# Altium PCB Main.PcbDoc
Units mil, origin at the board's own origin, x right, y up, seen from the top; angles counter-clockwise.
Board outline 1968.5 x 1911.5 mil, 4 copper layers (Top Layer, GND Place, 3V3 Plane, Bottom Layer), stack 23.756 mil thick; 22 components, 17 nets, 82 pads, 4 vias.
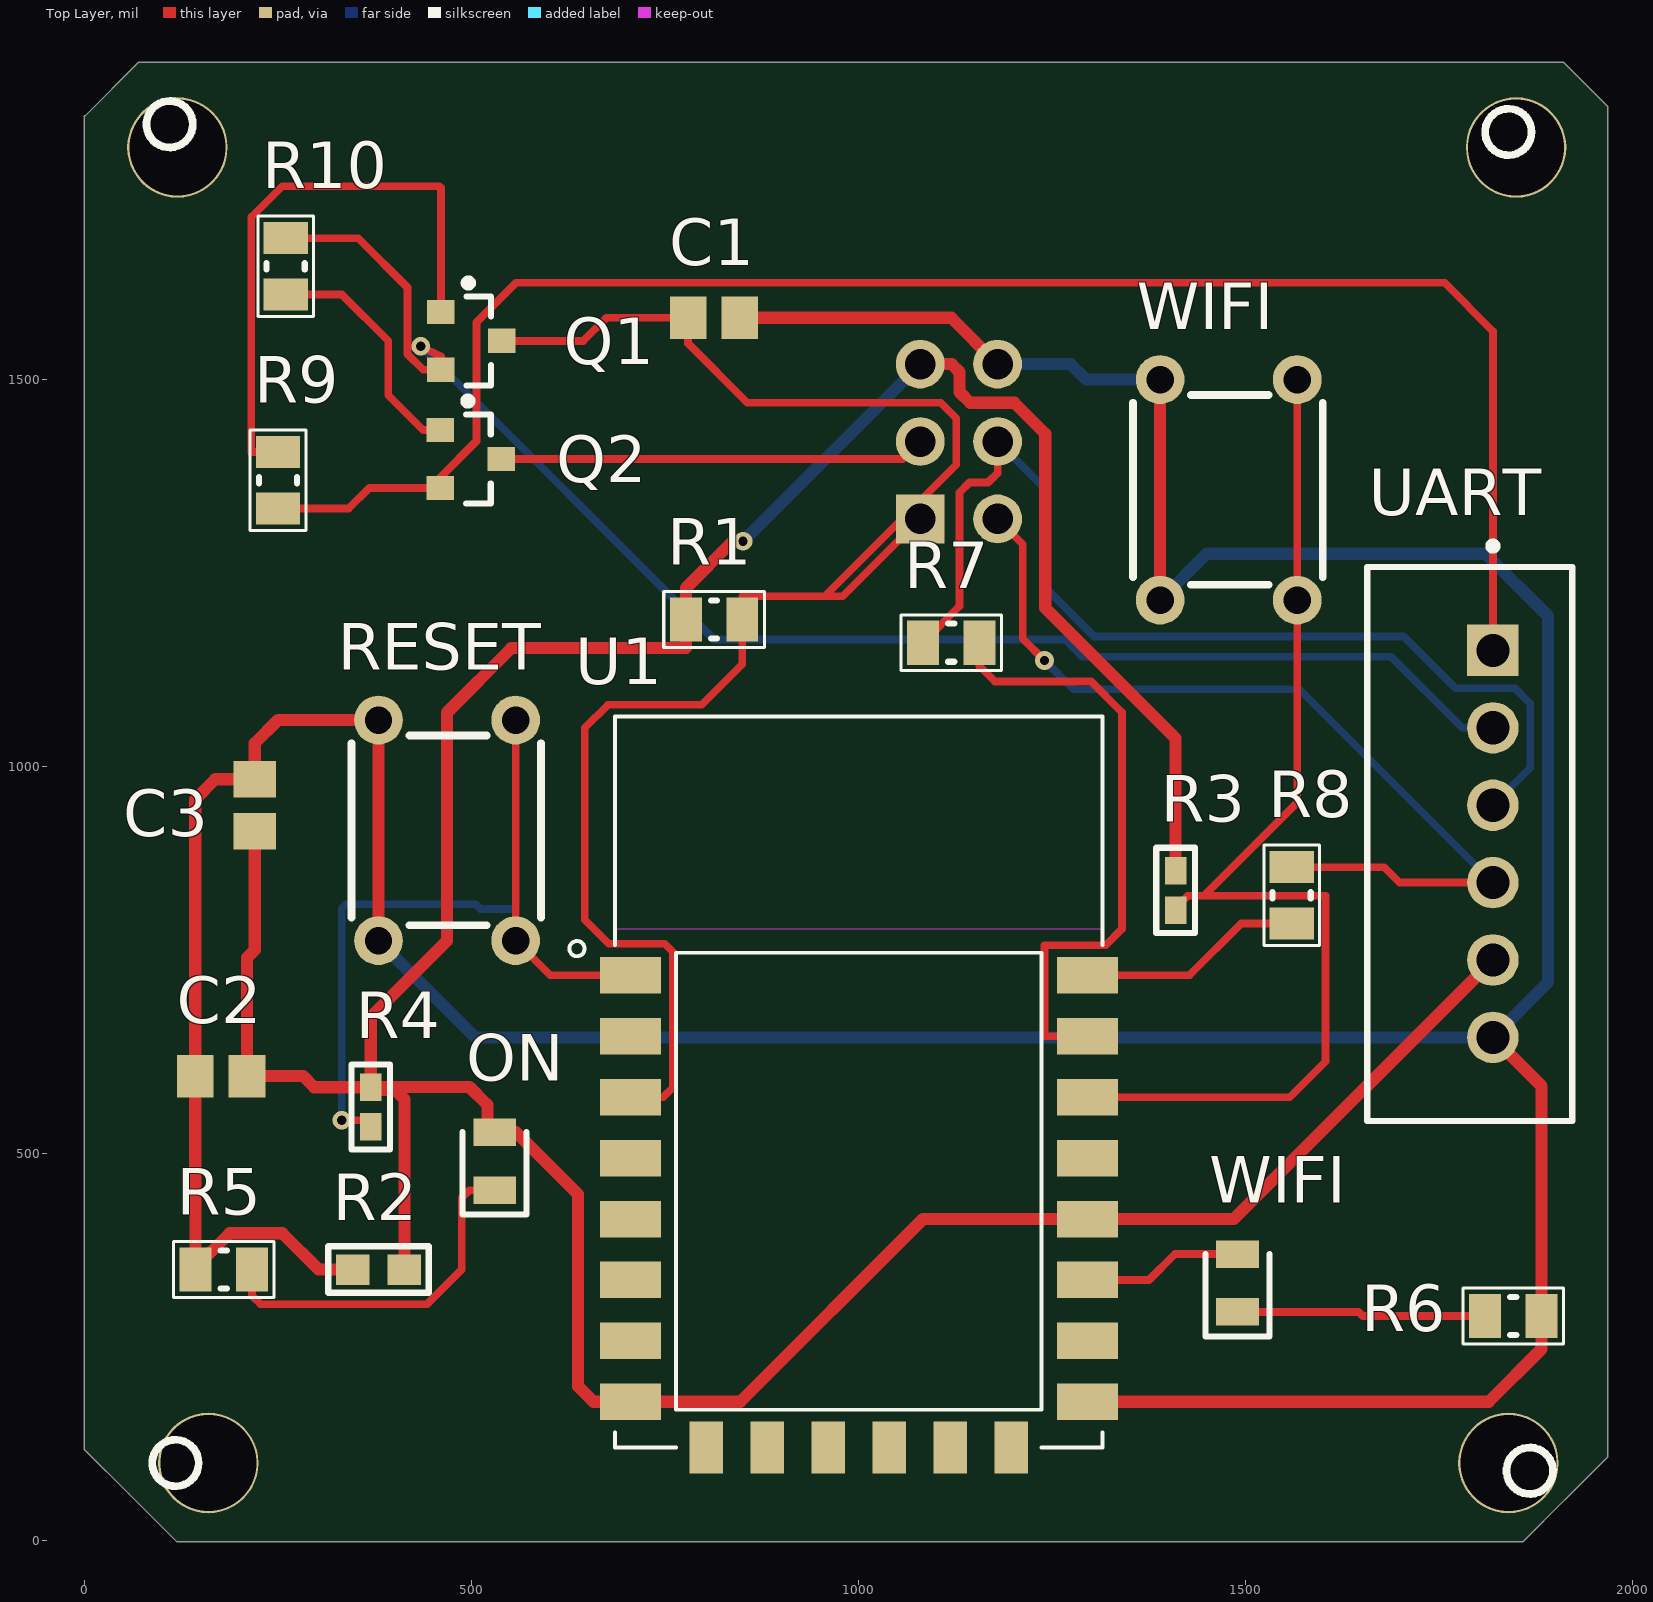
[diagram p0: Top Layer view]
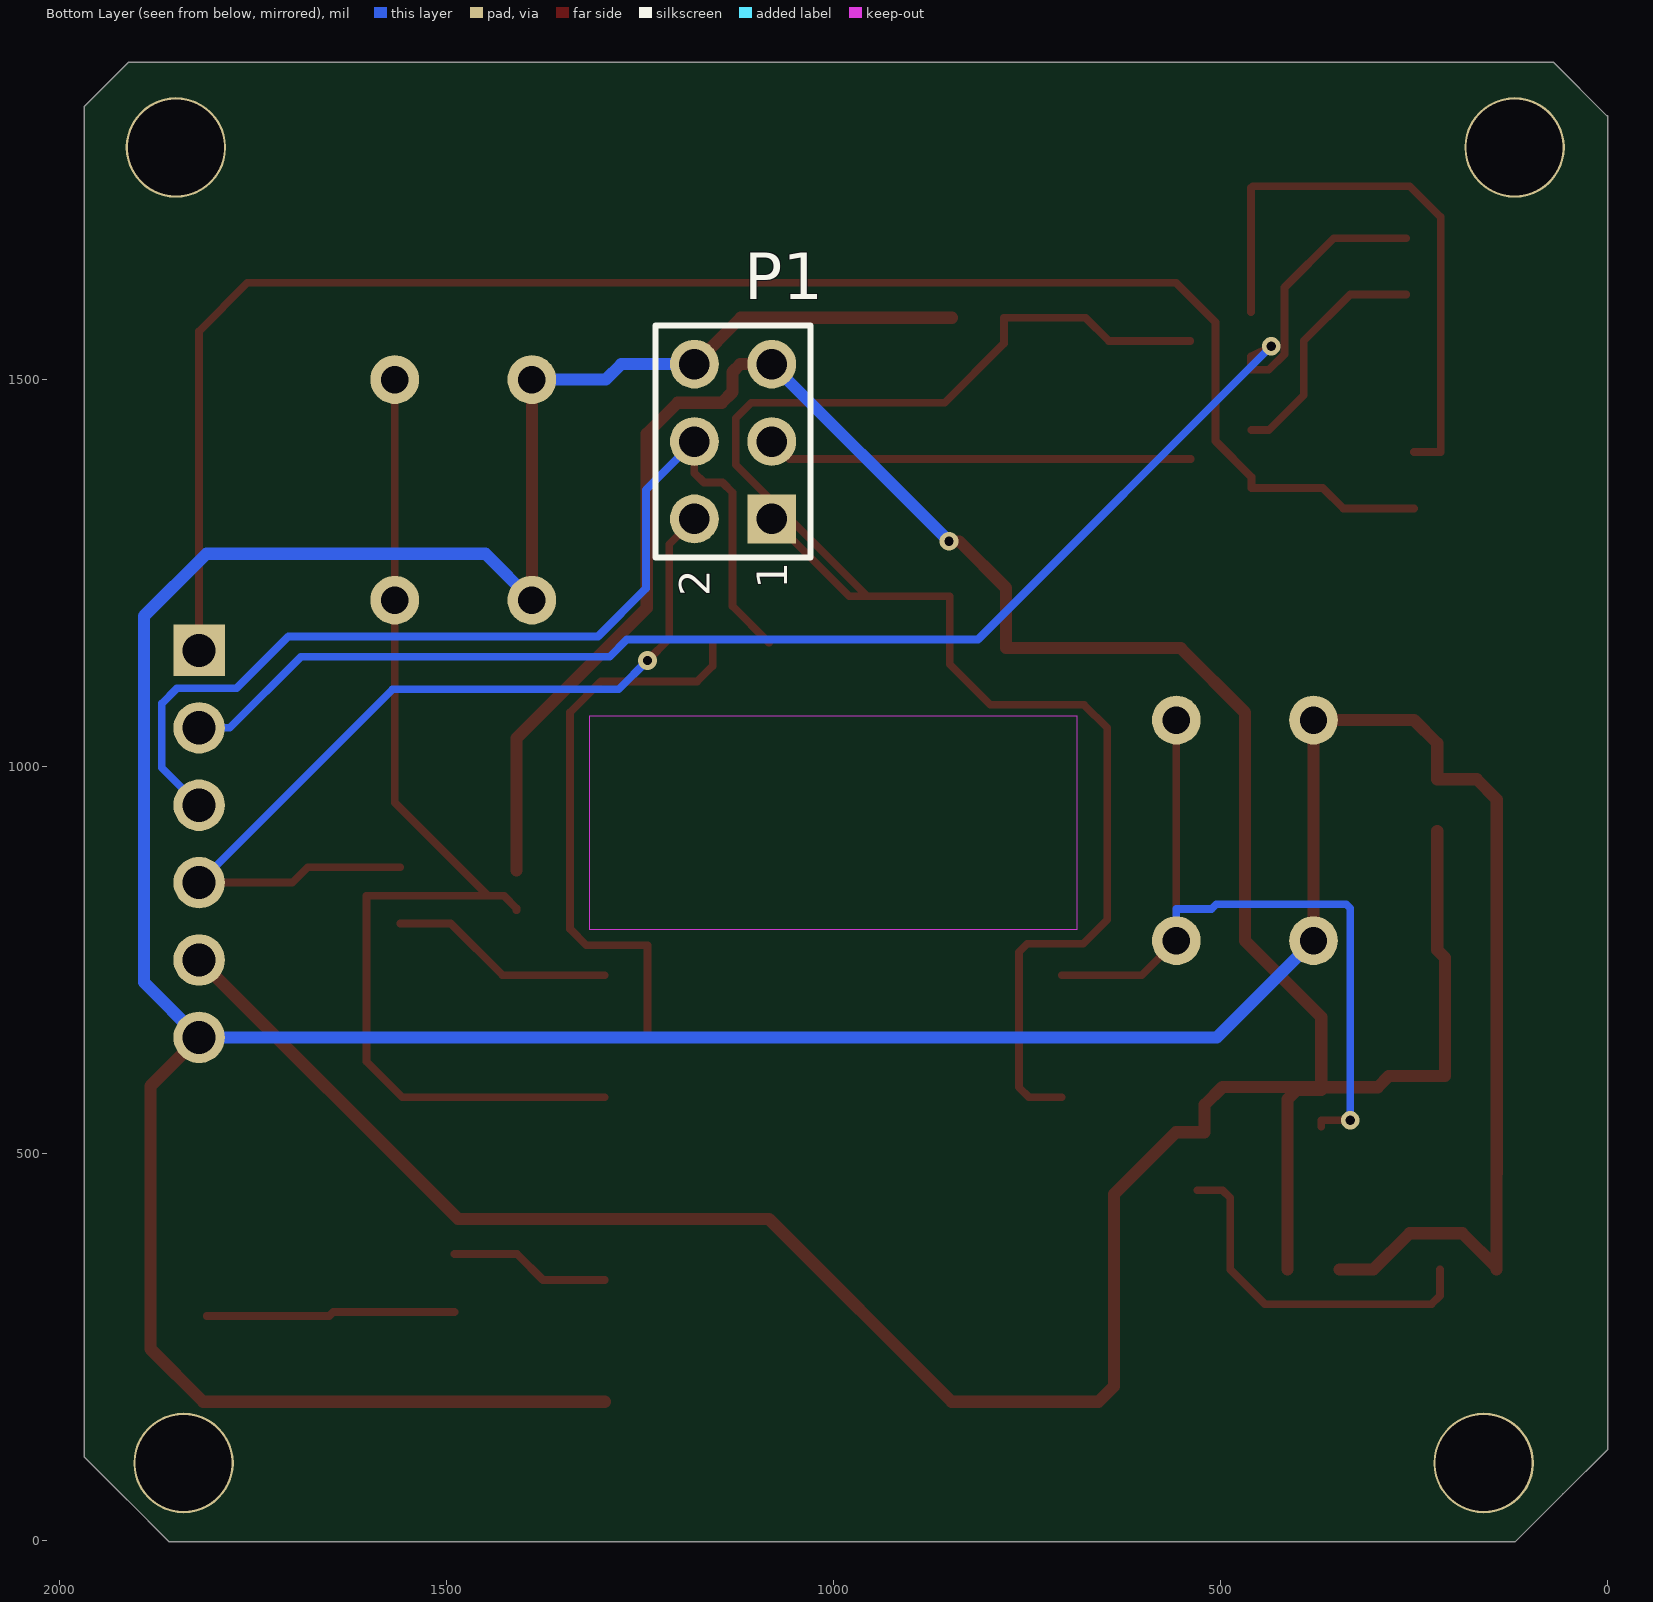
[diagram p1: Bottom Layer view, seen from below]
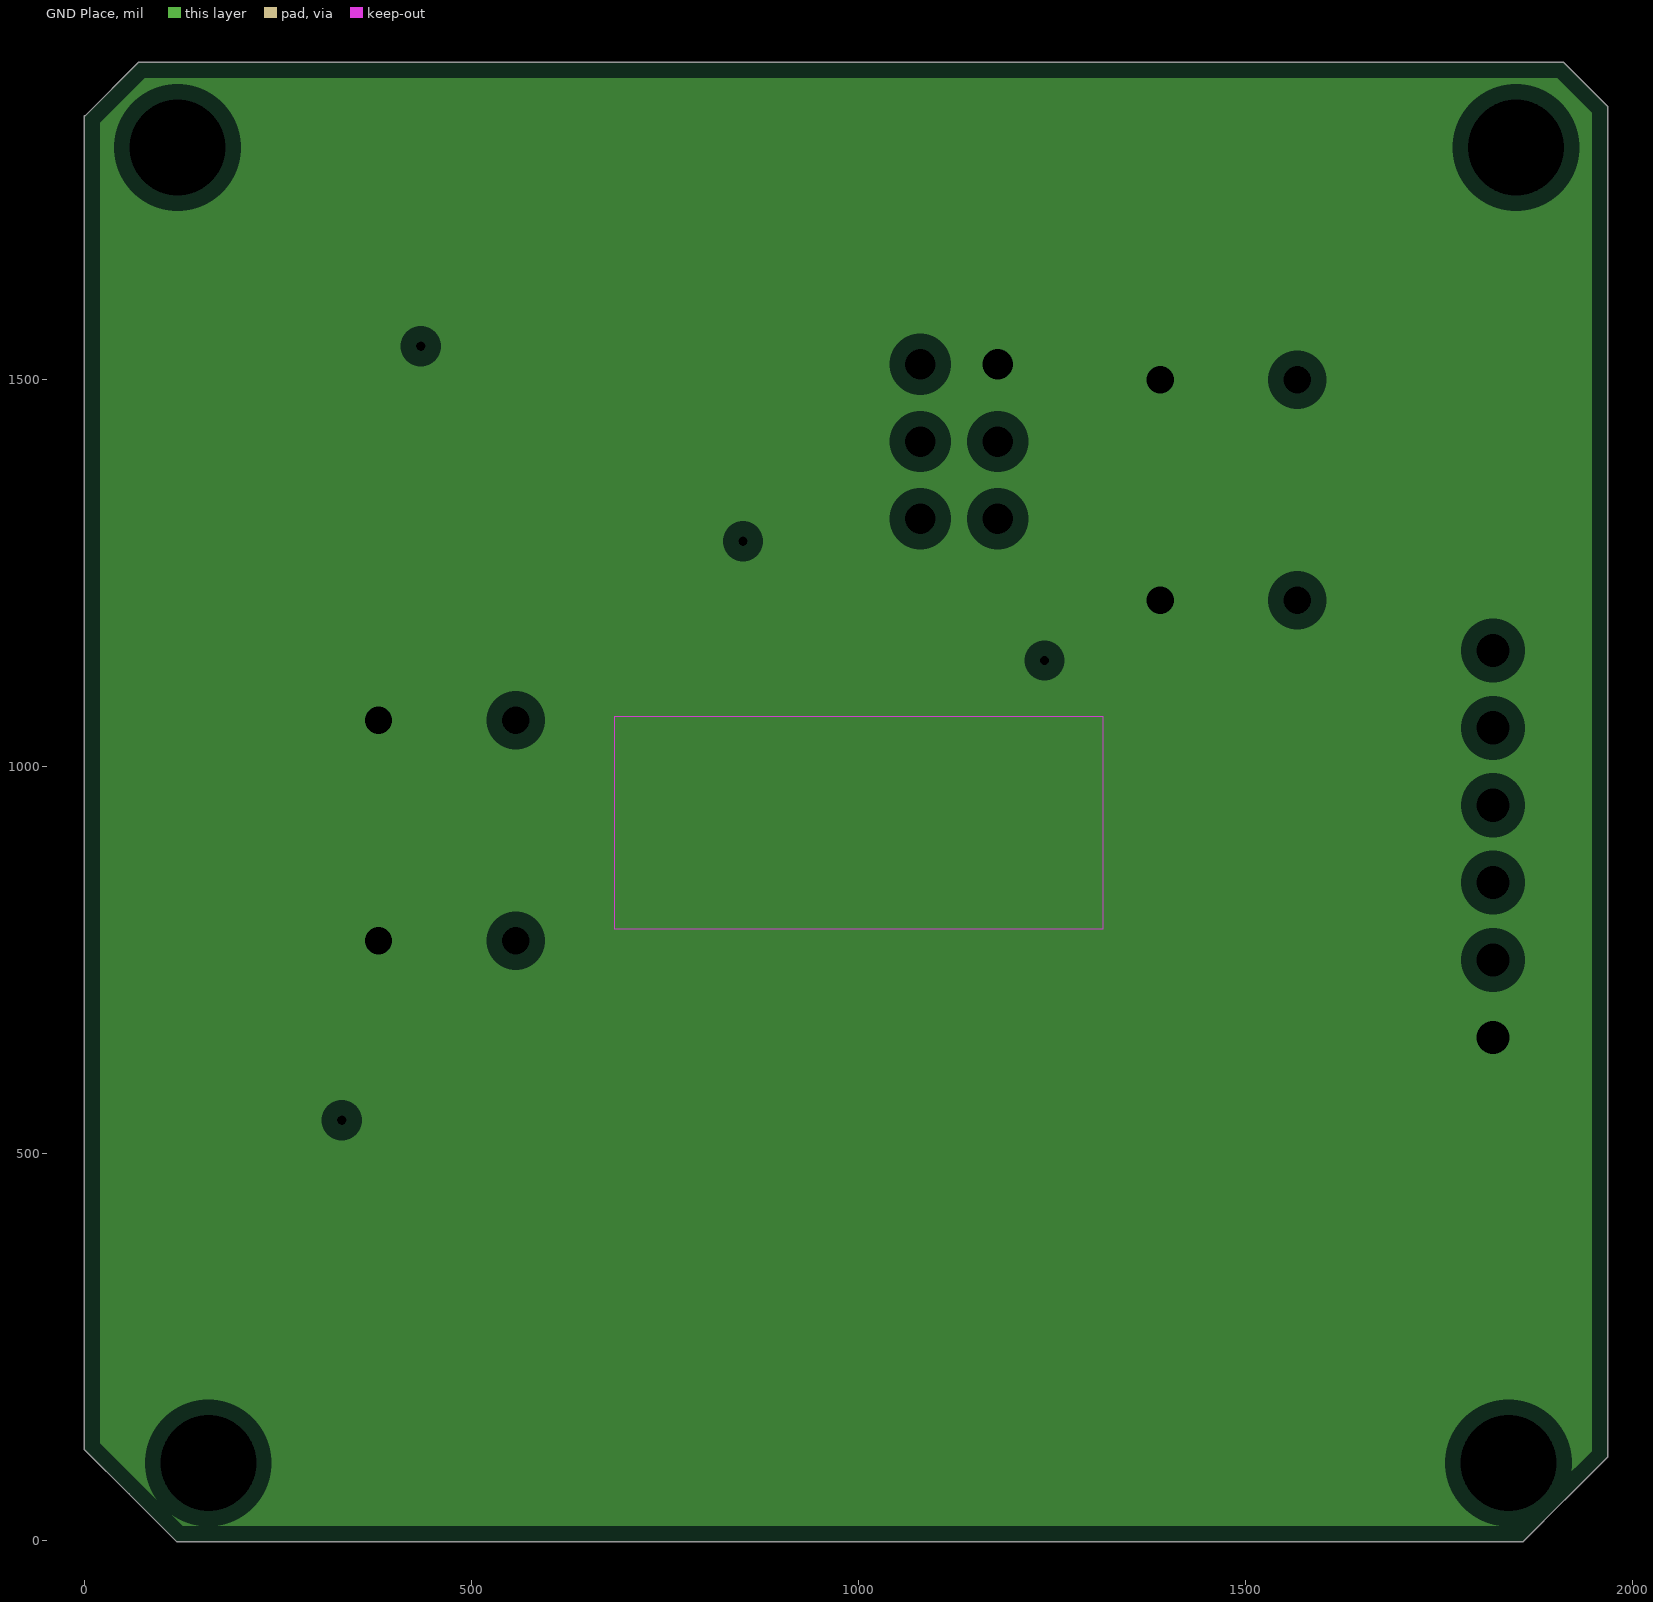
[diagram p2: GND Place, clearances drawn from the general rule]
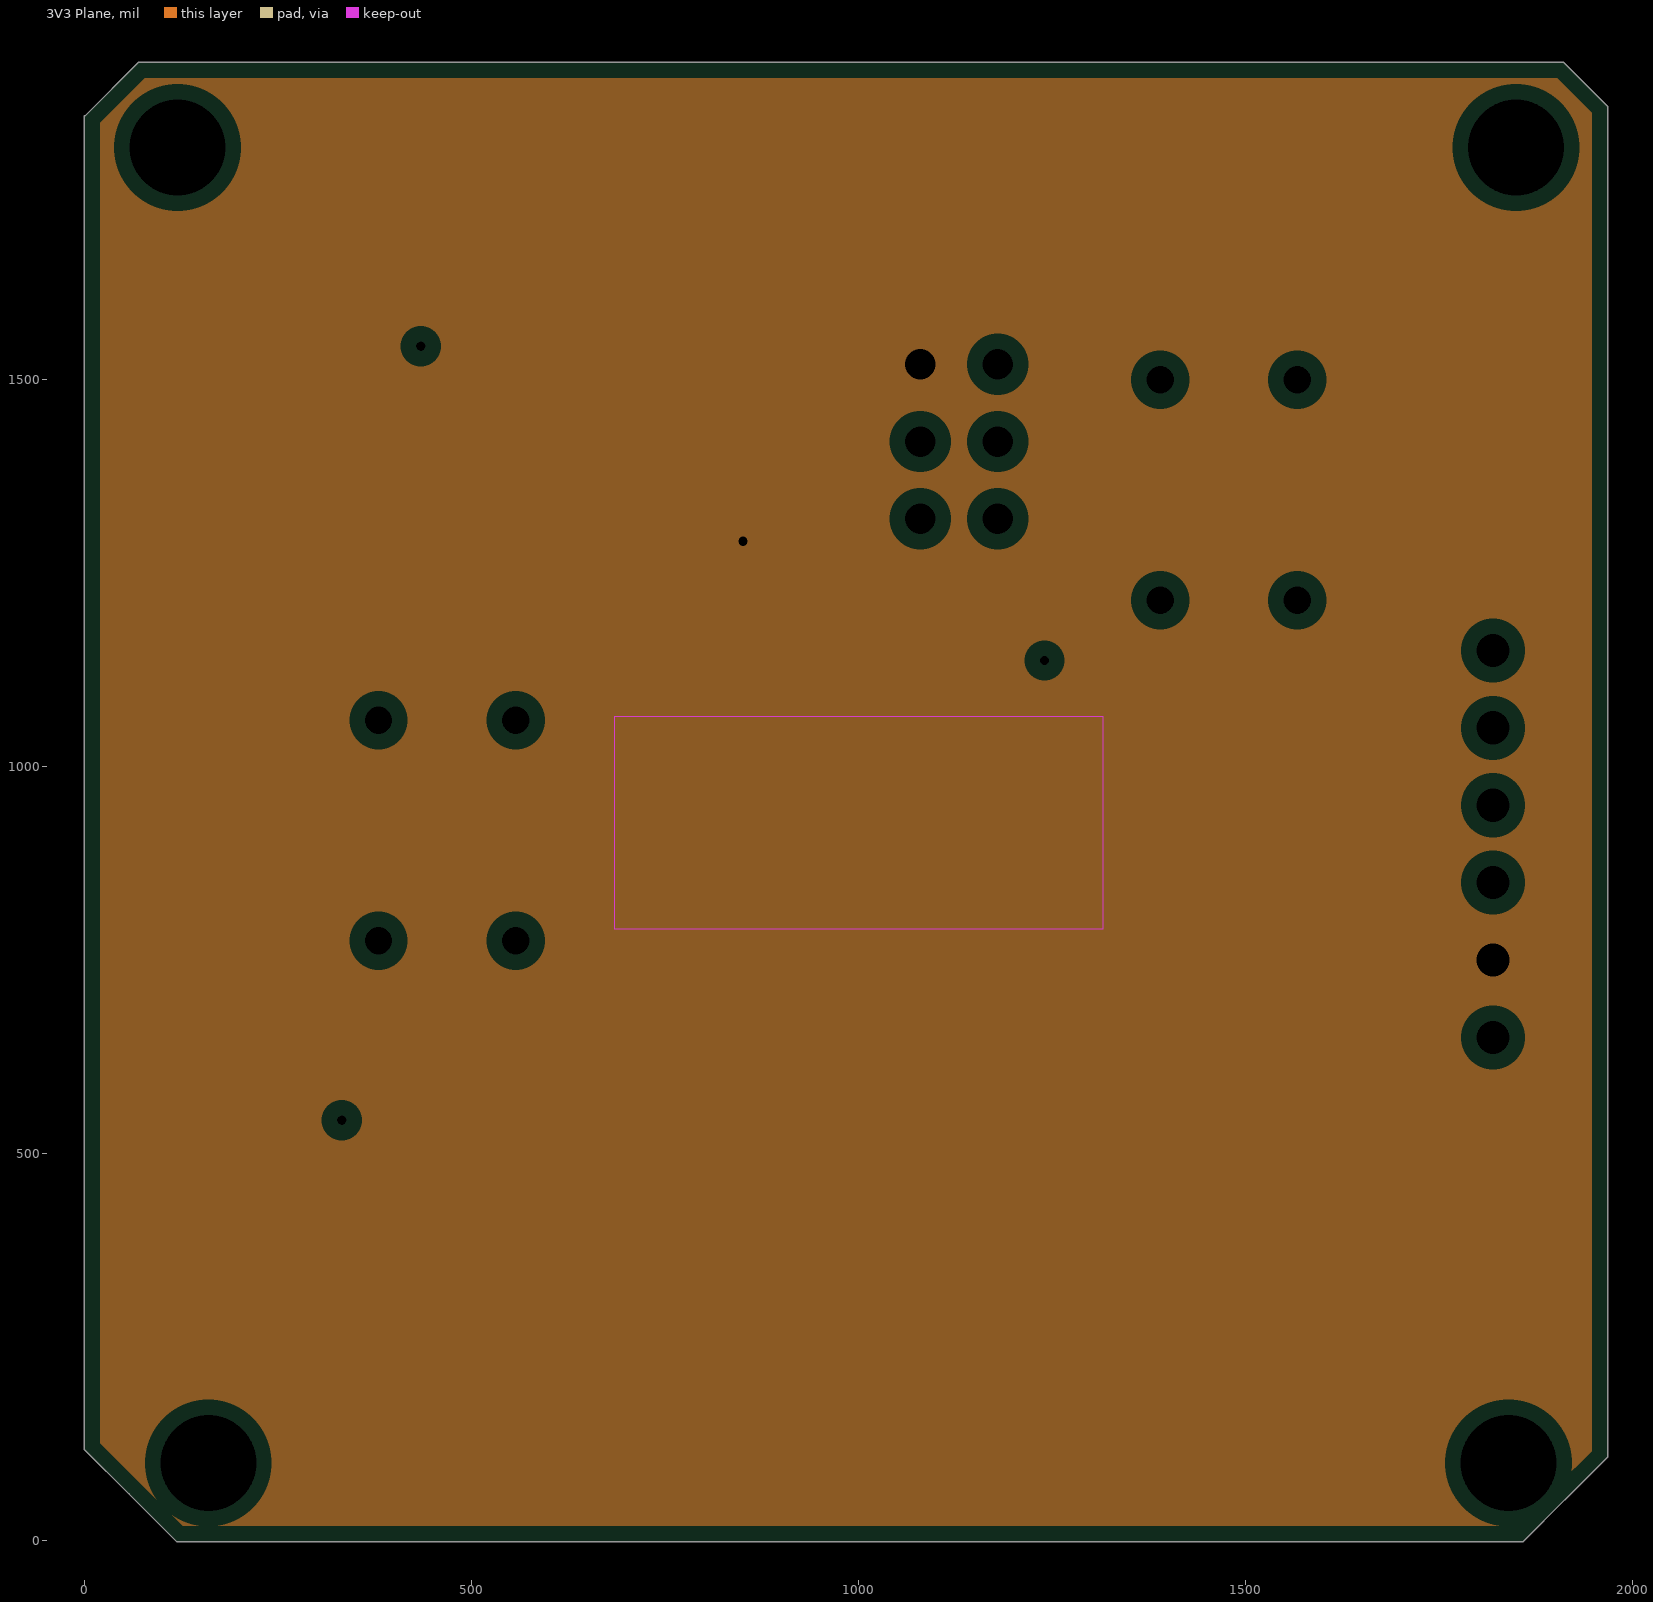
[diagram p3: 3V3 Plane, clearances drawn from the general rule]
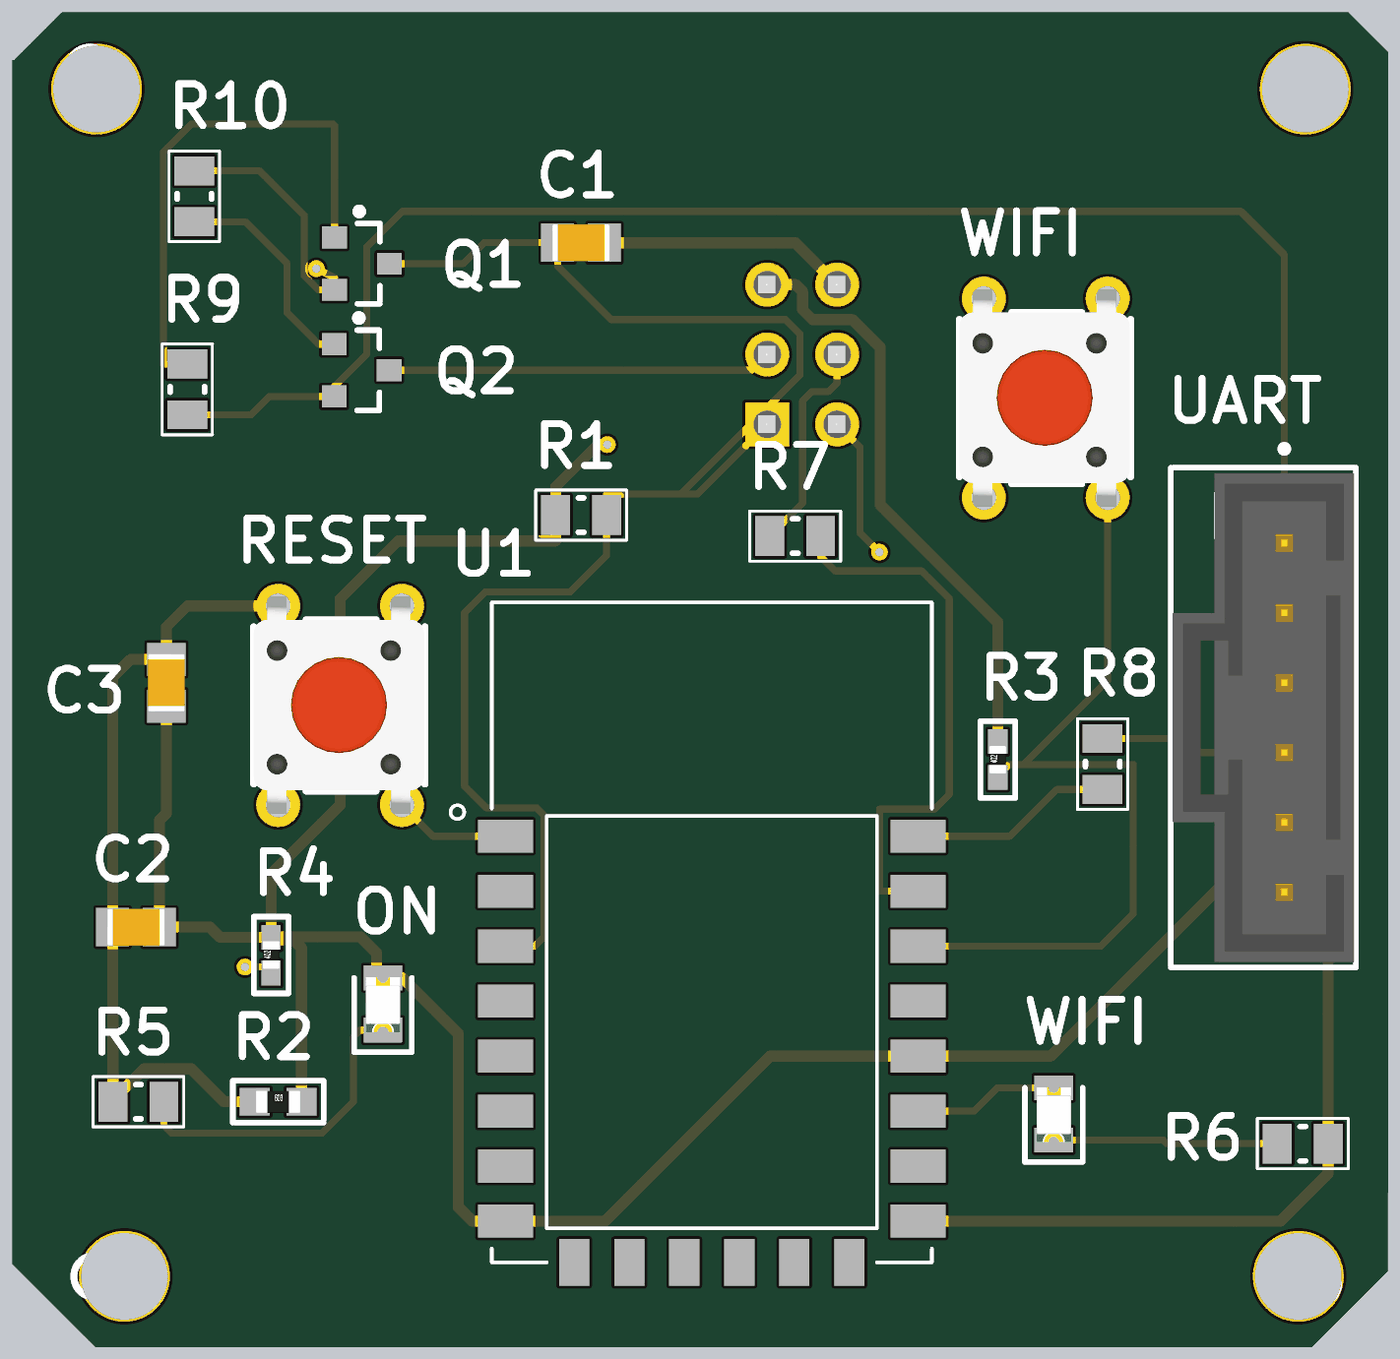
[diagram p4: 3D render of the assembled board from above, using the file's embedded part models]

## Layer stack, top to bottom
Top Solder: solder mask 0.4, Solder Resist, Dk 3.5
Top Layer: signal copper 1.4
Dielectric 2: prepreg 2.8, PP-006, Dk 4.1
GND Place: plane copper 1.378, net GND
Dielectric 1: dielectric 12.6, FR-4, Dk 4.8
3V3 Plane: plane copper 1.378, net +3V3
Dielectric 3: prepreg 2.8, PP-006, Dk 4.1
Bottom Layer: signal copper 1.4
Bottom Solder: solder mask 0.4, Solder Resist, Dk 3.5

## Board outline
-0.18,117.59 -0.18,1841.28 1.28,1841.28 70,1910 1911.31,1910 1968.32,1852.99 1968.32,220.71 1968.11,220.49 1968.11,107.34 1913.44,52.68 1913.34,52.68 1859.16,-1.5 119.11,-1.5 57.61,60 57.41,60

## Design rules (kind name [scope] priority, off if disabled: settings)
Clearance [All] p1: gap=10 ignorepadtopadclearanceinfootprint=FALSE except(0: Arc-Hole Track-Hole SMDPad-Hole THPad-Hole Via-Hole Fill-Hole Poly-Hole Region-Hole Text-Hole)
HoleSize [All] p1: absolutevalues=TRUE maxlimit=393.7 minlimit=0.98 maxpercent=80.000 minpercent=20.000
MinimumSolderMaskSliver [All] p1 off: minsoldermaskwidth=10
PlaneClearance [All] p1: clearance=20
PlaneConnect [All] p1: planeconnectstyle=Relief reliefexpansion=20 reliefentries=4 reliefconductorwidth=10 reliefairgap=10
PolygonConnect [All] p1: connectstyle=Relief reliefconductorwidth=10 reliefentries=4 polygonreliefangle="90 Angle" airgapwidth=10
RoutingVias [All] p1: holewidth=12 width=24 viastyle="Through Hole" minholewidth=8 minwidth=16 maxholewidth=20 maxwidth=40
SilkToSilkClearance [All] p1 off: silktosilkclearance=10
SilkToSolderMaskClearance [IsPad] p1 off: minsilkscreentomaskgap=4 clearancetoexposedcopper=TRUE
SolderMaskExpansion [All] p1: expansion=4 istentingtop=FALSE
Width Width_PowerNets [InNetClass('PowerNets')] p1: maxlimit=39.37 minlimit=10 preferedwidth=15.75
Width [All] p2: maxlimit=19.68 minlimit=7.87 preferedwidth=10
24 further rules are at their usual default settings.

## Classes and differential pairs
net class PowerNets: +3V3 GND

## Components (designator, comment, footprint, x,y, rotation, side; value= is the part's Value field where it differs from the comment)
C1 "0805 100nF" CAP0805 813.46,1580 r180 top
C2 "0805 100nF" CAP0805 176.54,600 r0 top
C3 "0805 4.7uF" CAP0805 220,950 r270 top
ON "RED 0805" LEDC2012X80N 530,490 r90 top (schematic designator LED1)
P1 "Header 3X2" HDR2X3M 1080,1320 r90 bottom
Q1 "MMBTA06LT1G" ONSC-SOT-23-3-318-08_V 500,1550 r0 top
Q2 "MMBTA06LT1G" ONSC-SOT-23-3-318-08_V 499.37,1397.4 r0 top
R1 "0805 10K" RES0805 813.58,1190 r0 top
R2 "10k" R1608[0603] 380,350 r0 top value=0
R3 "4.7k" R1005[0402] 1410,840 r90 top value=0
R4 "4.7k" R1005[0402] 370,560 r90 top value=0
R5 "0805 200R" RES0805 180,350 r0 top
R6 "0805 200R" RES0805 1846.42,290 r180 top
R7 "0805 100R" RES0805 1120,1160 r0 top
R8 "0805 100R" RES0805 1560,833.58 r270 top
R9 "0805 4K7" RES0805 250,1370 r90 top
R10 "0805 4K7" RES0805 260,1646.42 r270 top
RESET "SW-PB" PB-SW 380,780 r90 top (schematic designator S2)
U1 "ESP8266-12E/ESP-12E" XCVR_ESP8266-12E/ESP-12E 1000.63,454.65 r0 top
UART "0705430005" FP-0705430005-MFG 1820,900 r90 top (schematic designator CN1)
WIFI "SW-PB" PB-SW 1390,1220 r90 top (schematic designator S1)
WIFI "BLUE 0805" LEDC2012X80N 1490,332.6 r90 top (schematic designator LED2)

## Footprints (in the part's own frame and the unit in brackets; to place one, negate y for a bottom-side part, rotate by r counter-clockwise, add the part's x,y. Pads: shape width x height; smd on the part's side, far side on the other; paste and mask are expansions set on the pad)
CAP0805 [mm] "Chip Capacitor, 2-Leads, Body 2.1x1.35mm, IPC Medium Density"
  rect 1.2x1.4 smd: 1(-0.85,0) 2(0.85,0)
  body extent -1.05,-0.67 1.05,0.67, height 0.75
FP-0705430005-MFG [mm]
  rect 1.69x1.69 hole 1.09 paste-1000 mask+0: 1(6.35,0)
  round 1.69 hole 1.09 paste-1000 mask+0: 2(3.81,0) 3(1.27,0) 4(-1.27,0) 5(-3.81,0) 6(-6.35,0)
  silkscreen extent -9.09,-2.61 9.9,4.13, body extent -9.19,-2.71 9.19,4.23, height 0.25
HDR2X3M [mm] "Connector; Header; 3x2 Position"
  rect 1.6x1.6 hole 1: 1(0,0)
  round 1.6 hole 1: 2(0,2.54) 3(2.54,0) 4(2.54,2.54) 5(5.08,0) 6(5.08,2.54)
  silkscreen extent -1.27,-1.27 6.35,3.81, body extent -1.27,-1.27 6.35,3.77, height 8.5
LEDC2012X80N [mm]
  rect 0.9x1.4 smd: 1(-0.95,0) 2(0.95,0)
  silkscreen extent -1.75,-1.05 0.95,1.05, body extent -1.03,-0.63 0.97,0.63, height 0.7
ONSC-SOT-23-3-318-08_V [mm] "SOT23, 3-Leads, Body 2.92x1.3mm, Pitch 0.95mm"
  rect 0.9x0.8 smd: 1(-1,0.95) 2(-1,-0.95) 3(1,0)
  silkscreen extent -0.22,-1.46 0.65,2.02, body extent -0.65,-1.46 0.65,1.46, height 1.11
PB-SW [mm]
  round 1.6 hole 0.9: 1(-0.127,0) 1(7.112,0) 2(-0.127,-4.5) 2(7.112,-4.5)
  silkscreen extent 0.38,-5.33 6.6,0.89, body extent -0.44,-5.31 7.46,0.89, height 7.1
R1005[0402] [mm] "Chip Resistor; Body 1.1 x 0.5 mm (LxW typ)"
  rect 0.9x0.7 smd: 1(-0.65,0) 2(0.65,0)
  silkscreen extent -1.4,-0.63 1.4,0.64, body extent -0.5,-0.3 0.5,0.3, height 0.2
R1608[0603] [mm] "Chip Resistor; Body 1.6 x 0.8 mm (LxW typ)"
  rect 1.1x1 smd: 1(-0.85,0) 2(0.85,0)
  silkscreen extent -1.65,-0.76 1.65,0.76, body extent -0.8,-0.4 0.8,0.4, height 0.3
RES0805 [mm] "Chip Resistor, 2-Leads, Body 2.00x1.25mm, IPC Medium Density"
  rect 1.05x1.45 smd: 1(-0.925,0) 2(0.925,0)
  silkscreen extent -1.65,-0.91 1.65,0.91, body extent -1.1,-0.72 1.1,0.72, height 0.5
XCVR_ESP8266-12E/ESP-12E [mm]
  rect 2x1.2 smd: 1(-7.5,7) 2(-7.5,5) 3(-7.5,3) 4(-7.5,1) 5(-7.5,-1) 6(-7.5,-3) 7(-7.5,-5) 8(-7.5,-7) 15(7.5,-7) 16(7.5,-5) 17(7.5,-3) 18(7.5,-1) 19(7.5,1) 20(7.5,3) 21(7.5,5) 22(7.5,7)
  rect 1.1x1.7 smd: 9(-5,-8.5) 10(-3,-8.5) 11(-1,-8.5) 12(1,-8.5) 13(3,-8.5) 14(5,-8.5)
  Keep-Out Layer region: 8,8.51 -8.009,8.51 -8.009,15.5 8,15.5
  Keep-Out Layer region: 8,8.51 -8.009,8.51 -8.009,15.5 8,15.5
  silkscreen extent -9.5,-8.5 8,15.5

## Part data
C1 C2: library part CC0805KRX7R9BB104, "CC Series 0805 0.1 uF 50 V ±10 % Tolerance X7R SMT Multilayer Ceramic Capacitor", Capacitance=100nF, Case Code (Imperial)=0805, Case Code (Metric)=2012, Dielectric=X7R, Insulation Resistance=100GR, Manufacturer=Yageo, Max Operating Temperature=125°C, Min Operating Temperature=-55°C, Package Quantity=1, Supplier Part Number 1=311-1140-2-ND, Tolerance=10%, Voltage=50V, Case/Package=0805, Category="Ceramic Capacitors", ComponentLink1Description=https://datasheet.ciiva.com/11786/0900766b80d84f1d-11786009.pdf?src-supplier=RSComponents, ComponentLink1URL=https://datasheet.ciiva.com/11786/0900766b80d84f1d-11786009.pdf?src-supplier=RSComponents, ComponentLink2Description=https://datasheet.ciiva.com/155/mlccorderingcode-155929.pdf?src-supplier=Digi-Key, ComponentLink2URL=https://datasheet.ciiva.com/155/mlccorderingcode-155929.pdf?src-supplier=Digi-Key, ComponentLink3Description=https://datasheet.ciiva.com/155/mlccorderingcode-155930.pdf?src-supplier=Digi-Key, ComponentLink3URL=https://datasheet.ciiva.com/155/mlccorderingcode-155930.pdf?src-supplier=Digi-Key, ComponentLink4Description=https://datasheet.ciiva.com/155/mlccorderingcode-155931.pdf?src-supplier=Digi-Key, ComponentLink4URL=https://datasheet.ciiva.com/155/mlccorderingcode-155931.pdf?src-supplier=Digi-Key, ComponentLink5Description=https://datasheet.ciiva.com/11464/upy-gphc-x7r-6-3v-to-50v-8-11464757.pdf?src-supplier=Avnet, ComponentLink5URL=https://datasheet.ciiva.com/11464/upy-gphc-x7r-6-3v-to-50v-8-11464757.pdf?src-supplier=Avnet, ComponentLink6Description=https://datasheet.ciiva.com/16625/upy-gphc-x7r-6-3v-to-50v-8-16625549.pdf?src-supplier=Avnet+Europe, ComponentLink6URL=https://datasheet.ciiva.com/16625/upy-gphc-x7r-6-3v-to-50v-8-16625549.pdf?src-supplier=Avnet+Europe, ComponentLink7Description=https://datasheet.ciiva.com/28450/1489800-28450805.pdf?src-supplier=Element14, ComponentLink7URL=https://datasheet.ciiva.com/28450/1489800-28450805.pdf?src-supplier=Element14, ComponentLink8Description=https://datasheet.ciiva.com/46393/1734573-46393307.pdf?src-supplier=Element14, ComponentLink8URL=https://datasheet.ciiva.com/46393/1734573-46393307.pdf?src-supplier=Element14, ComponentLink9Description=https://datasheet.ciiva.com/29242/445210-da-01-en-kerko-chip-0805-x7r-0-1uf-10proz-50vg-29242074.pdf?src-supplier=Conrad, ComponentLink9URL=https://datasheet.ciiva.com/29242/445210-da-01-en-kerko-chip-0805-x7r-0-1uf-10proz-50vg-29242074.pdf?src-supplier=Conrad, Depth=1.25mm, Halogen Free="Halogen Free", Height=0.85mm, Lead Free="Lead Free", Length=2mm, Manufacturer Part Number=CC0805KRX7R9BB104, Material=Ceramic, Mount="Surface Mount", Number of Pins=2, Packaging="Tape and Reel", Pricing 1="4000=0,01864, 8000=0,01734 (USD)", Radiation Hardening=No, REACH SVHC="No SVHC", RoHS=Yes, RoHS Compliant=Yes, Series=CC, Stock 1=7319595, Supplier 1=Digi-Key, Termination=SMD/SMT, Thickness=0.033inch, Voltage Rating=50V, Width=0.049inch
C3: library part C2012X5R1H475K125AB, "4.7uF ±10% 50V 0805", Capacitance=4.7uF, Case Code (Imperial)=0805, Case Code (Metric)=2012, Dielectric=X5R, Dielectric Material=Ceramic, Manufacturer=TDK, Max Operating Temperature=85°C, Min Operating Temperature=-55°C, Package Quantity=1, Supplier Part Number 1=7883041, Tolerance=10%, Voltage=50V, Case/Package=0805, Category="Ceramic Capacitors", ComponentLink1Description=https://datasheet.ciiva.com/24216/c2012x5r1h475k125ab-265006-24216434.pdf?src-supplier=Mouser, ComponentLink1URL=https://datasheet.ciiva.com/24216/c2012x5r1h475k125ab-265006-24216434.pdf?src-supplier=Mouser, ComponentLink2Description=https://datasheet.ciiva.com/22725/1913358-22725564.pdf?src-supplier=Element14, ComponentLink2URL=https://datasheet.ciiva.com/22725/1913358-22725564.pdf?src-supplier=Element14, ComponentLink3Description=https://datasheet.ciiva.com/28673/mlcc-commercial-general-en-28673541.pdf?src-supplier=Element14, ComponentLink3URL=https://datasheet.ciiva.com/28673/mlcc-commercial-general-en-28673541.pdf?src-supplier=Element14, ComponentLink4Description=https://datasheet.ciiva.com/6276/tdkmlcccaprange-6276526.pdf?src-supplier=Digi-Key, ComponentLink4URL=https://datasheet.ciiva.com/6276/tdkmlcccaprange-6276526.pdf?src-supplier=Digi-Key, ComponentLink5Description=https://datasheet.ciiva.com/48671/e412-c-48671374.pdf?src-supplier=Avnet, ComponentLink5URL=https://datasheet.ciiva.com/48671/e412-c-48671374.pdf?src-supplier=Avnet, Construction=Flat, Depth=1.25mm, Height=1.25mm, Lead Free="Lead Free", Length=2mm, Manufacturer Part Number=C2012X5R1H475K125AB, Mount="Surface Mount", Packaging="Tape and Reel", Pricing 1="10=0,38900, 100=0,36600, 250=0,34200, 500=0,32300, 1000=0,29200 (USD)", Radiation Hardening=No, REACH SVHC="No SVHC", Resistor Type=Ceramic, RoHS=Yes, RoHS Compliant=Yes, Series=C, Stock 1=610, Supplier 1=RSComponents, Termination=SMD/SMT, Thickness=0.057inch, Voltage Rating=50V, Voltage Rating (DC)=50V, Weight=0.000194oz, Width=0.049inch
ON WIFI: library part 150080RS75000, "Red SMD 625nm LED Indication - Discrete 2V 0805 (2012 Metric)", Manufacturer_Name="Wurth Elektronik", Mouser Part Number=710-150080RS75000, Datasheet Link=https://componentsearchengine.com/Datasheets/2/150080RS75000.pdf, Height=0.8mm, Manufacturer_Part_Number=150080RS75000, Mouser Price/Stock=https://www.mouser.co.uk/ProductDetail/Wurth-Elektronik/150080RS75000?qs=LlUlMxKIyB2jdCo7bnfgew%3D%3D
P1: "Header, 3-Pin, Dual row", LatestRevisionDate=17-Jul-2002, LatestRevisionNote="Re-released for DXP Platform.", Publisher="Altium Limited"
Q1 Q2: "Trans GP BJT NPN 80V 0.5A 3-Pin SOT-23 T/R", Case/Package=SOT-23-3, Collector Base Voltage (VCBO)=80V, Collector Emitter Saturation Voltage=250mV, Current Rating=500mA, Emitter Base Voltage (VEBO)=4V, Frequency=100MHz, Manufacturer="ON Semiconductor", Max Operating Temperature=150°C, Max Power Dissipation=225mW, Min Operating Temperature=-55°C, Package Quantity=1, Power Dissipation=300mW, Supplier Part Number 1=MMBTA06LT1GOSCT-ND, Category=BJTs, Collector Emitter Breakdown Voltage=80V, Collector Emitter Voltage (VCEO)=80V, Collector-emitter Voltage-Max=250mV, ComponentLink1Description=https://datasheet.ciiva.com/4722/mmbta05lt1-d-101659-4722113.pdf?src-supplier=Mouser, ComponentLink1URL=https://datasheet.ciiva.com/4722/mmbta05lt1-d-101659-4722113.pdf?src-supplier=Mouser, ComponentLink2Description=https://datasheet.ciiva.com/15139/getdatasheetpartid-137838-15139444.pdf?src-supplier=Verical, ComponentLink2URL=https://datasheet.ciiva.com/15139/getdatasheetpartid-137838-15139444.pdf?src-supplier=Verical, ComponentLink3Description=https://datasheet.ciiva.com/976/mmbta05lt1-d-976473.pdf?src-supplier=Digi-Key, ComponentLink3URL=https://datasheet.ciiva.com/976/mmbta05lt1-d-976473.pdf?src-supplier=Digi-Key, ComponentLink4Description=https://datasheet.ciiva.com/976/mmbta05lt1-d-976474.pdf?src-supplier=Digi-Key, ComponentLink4URL=https://datasheet.ciiva.com/976/mmbta05lt1-d-976474.pdf?src-supplier=Digi-Key, ComponentLink5Description=https://datasheet.ciiva.com/976/mmbta05lt1-d-976475.pdf?src-supplier=Digi-Key, ComponentLink5URL=https://datasheet.ciiva.com/976/mmbta05lt1-d-976475.pdf?src-supplier=Digi-Key, ComponentLink6Description=https://datasheet.ciiva.com/11197/mmbta05lt1-d-11197414.pdf?src-supplier=Avnet, ComponentLink6URL=https://datasheet.ciiva.com/11197/mmbta05lt1-d-11197414.pdf?src-supplier=Avnet, ComponentLink7Description=https://datasheet.ciiva.com/11198/mmbta05lt1-d-11198678.pdf?src-supplier=Avnet, ComponentLink7URL=https://datasheet.ciiva.com/11198/mmbta05lt1-d-11198678.pdf?src-supplier=Avnet, ComponentLink8Description=https://datasheet.ciiva.com/25998/mmbta05lt1-d-25998830.pdf?src-supplier=Avnet+Europe, ComponentLink8URL=https://datasheet.ciiva.com/25998/mmbta05lt1-d-25998830.pdf?src-supplier=Avnet+Europe, ComponentLink9Description=https://datasheet.ciiva.com/16465/mmbta05lt1-d-16465685.pdf?src-supplier=Future+Electronics, ComponentLink9URL=https://datasheet.ciiva.com/16465/mmbta05lt1-d-16465685.pdf?src-supplier=Future+Electronics, ComponentLink10Description=https://datasheet.ciiva.com/7972/mmbta05lt1-d-7972078.pdf?src-supplier=Element14, ComponentLink10URL=https://datasheet.ciiva.com/7972/mmbta05lt1-d-7972078.pdf?src-supplier=Element14, ComponentLink11Description=https://datasheet.ciiva.com/16478/mmbta05lt1-d-16478574.pdf?src-supplier=Avnet+Asia, ComponentLink11URL=https://datasheet.ciiva.com/16478/mmbta05lt1-d-16478574.pdf?src-supplier=Avnet+Asia, Contact Plating=Tin,Matte, Element Configuration=Single, Gain Bandwidth Product=100MHz, Height=0.04inch, hFE Min=100, Lead Free="Lead Free", Length=0.119inch, Manufacturer Part Number=MMBTA06LT1G, Max Breakdown Voltage=80V, Max Collector Current=500mA, Max Frequency=100MHz, Number of Elements=1, Number of Pins=3, Packaging="Tape and Reel", Polarity=NPN, Pricing 1="1=0,17000, 10=0,12300, 25=0,11800, 100=0,06650, 500=0,05220, 1000=0,03625 (USD)", Radiation Hardening=No, REACH SVHC="No SVHC", RoHS=Yes, RoHS Compliant=Yes, Series=-, Stock 1=9300, Supplier 1=Digi-Key, Supplier 2=Avnet, Supplier Part Number 2=MMBTA06LT1G, Transition Frequency=100MHz, Voltage Rating (DC)=80V, Width=0.055inch
R1: library part RC0805FR-0710KL, "10K Omhs 0805 ± 1.00% 0.125W ± 100ppm/℃", Case Code (Imperial)=0603, Case Code (Metric)=1608, Manufacturer=Yageo, Manufacturer Part Number=RC0603FR-0710KL, Max Operating Temperature=155°C, Max Power Dissipation=100mW, Min Operating Temperature=-55°C, Package Quantity=1, Resistance=10kR, Resistance Tolerance=1%, Resistor Type="Thick Film", Supplier Part Number 1=6185163, Temperature Coefficient=100ppm/°C, Voltage Rating=75V, Voltage Rating (DC)=50V, Case/Package=0603, Category="Chip SMD Resistors", ComponentLink1Description=https://datasheet.ciiva.com/7660/38590-7660789.pdf?src-supplier=Element14, ComponentLink1URL=https://datasheet.ciiva.com/7660/38590-7660789.pdf?src-supplier=Element14, ComponentLink2Description=https://datasheet.ciiva.com/7983/443971-7983596.pdf?src-supplier=Element14, ComponentLink2URL=https://datasheet.ciiva.com/7983/443971-7983596.pdf?src-supplier=Element14, ComponentLink3Description=https://datasheet.ciiva.com/22747/443971-22747519.pdf?src-supplier=Element14, ComponentLink3URL=https://datasheet.ciiva.com/22747/443971-22747519.pdf?src-supplier=Element14, ComponentLink4Description=https://datasheet.ciiva.com/46440/1868787-46440891.pdf?src-supplier=Element14, ComponentLink4URL=https://datasheet.ciiva.com/46440/1868787-46440891.pdf?src-supplier=Element14, ComponentLink5Description=https://datasheet.ciiva.com/7746/1738695-7746239.pdf?src-supplier=Element14, ComponentLink5URL=https://datasheet.ciiva.com/7746/1738695-7746239.pdf?src-supplier=Element14, ComponentLink6Description=https://datasheet.ciiva.com/15189/getdatasheetpartid-409289-15189591.pdf?src-supplier=Verical, ComponentLink6URL=https://datasheet.ciiva.com/15189/getdatasheetpartid-409289-15189591.pdf?src-supplier=Verical, ComponentLink7Description=https://datasheet.ciiva.com/11808/0900766b8106beab-11808151.pdf?src-supplier=RSComponents, ComponentLink7URL=https://datasheet.ciiva.com/11808/0900766b8106beab-11808151.pdf?src-supplier=RSComponents, ComponentLink8Description=https://datasheet.ciiva.com/46447/444164-46447563.pdf?src-supplier=Element14, ComponentLink8URL=https://datasheet.ciiva.com/46447/444164-46447563.pdf?src-supplier=Element14, ComponentLink9Description=https://datasheet.ciiva.com/2456/pyu-r-int-thick-7-2456973.pdf?src-supplier=Digi-Key, ComponentLink9URL=https://datasheet.ciiva.com/2456/pyu-r-int-thick-7-2456973.pdf?src-supplier=Digi-Key, ComponentLink10Description=https://datasheet.ciiva.com/2456/pyu-r-int-thick-7-2456974.pdf?src-supplier=Digi-Key, ComponentLink10URL=https://datasheet.ciiva.com/2456/pyu-r-int-thick-7-2456974.pdf?src-supplier=Digi-Key, ComponentLink11Description=https://datasheet.ciiva.com/2456/pyu-r-int-thick-7-2456972.pdf?src-supplier=Digi-Key, ComponentLink11URL=https://datasheet.ciiva.com/2456/pyu-r-int-thick-7-2456972.pdf?src-supplier=Digi-Key, ComponentLink12Description=https://datasheet.ciiva.com/12669/rc0805-12669688.pdf?src-supplier=Mouser, ComponentLink12URL=https://datasheet.ciiva.com/12669/rc0805-12669688.pdf?src-supplier=Mouser, ComponentLink13Description=https://datasheet.ciiva.com/16747/rc0805-16747087.pdf?src-supplier=Future+Electronics, ComponentLink13URL=https://datasheet.ciiva.com/16747/rc0805-16747087.pdf?src-supplier=Future+Electronics, Construction=Rectangular, Depth=0.8mm, Features="Moisture Resistant", Height=0.45mm, Lead Free="Lead Free", Lead Pitch=0.3mm, Length=1.6mm, Military Standard=Not, Number of Pins=2, Number of Terminations=2, Packaging="Tape and Reel", Power Rating=100mW, Pricing 1="5000=0,00312 (USD)", Pricing 2="5000=0,00700 (USD)", REACH SVHC=Unknown, RoHS=Yes, RoHS Compliant=Yes, Series=RC, Size Code=0603, Stock 1=19091268, Stock 2=435000, Supplier 1=RSComponents, Technology="THICK FILM", Termination=SMD/SMT, Tolerance=1%, Weight=7.1E-05oz, Width=0.8mm
R2: library part R, "Res, 10K, 0.01%, 0.25W, 1206, Metal Foil", Case Code (Imperial)=1206, Case Code (Metric)=3216, Manufacturer Part Number=Y163010K0000T9R, Max Operating Temperature=150°C, Max Power Dissipation=250mW, Min Operating Temperature=-55°C, Package Quantity=1, Resistance=10kR, Resistor Type="Metal Foil", Supplier Part Number 1=Y1630-10.0KBCT-ND, Temperature Coefficient=0.2ppm/°C, Tolerance=0.01%, Case/Package=1206, Category="Chip SMD Resistors", ComponentLink1Description=https://datasheet.ciiva.com/29711/vfcpseri-29711161.pdf?src-supplier=Digi-Key, ComponentLink1URL=https://datasheet.ciiva.com/29711/vfcpseri-29711161.pdf?src-supplier=Digi-Key, ComponentLink2Description=https://datasheet.ciiva.com/29711/vfcpseri-29711162.pdf?src-supplier=Digi-Key, ComponentLink2URL=https://datasheet.ciiva.com/29711/vfcpseri-29711162.pdf?src-supplier=Digi-Key, ComponentLink3Description=https://datasheet.ciiva.com/18610/vfcpseri-18610015.pdf?src-supplier=Digi-Key, ComponentLink3URL=https://datasheet.ciiva.com/18610/vfcpseri-18610015.pdf?src-supplier=Digi-Key, Features="Moisture Resistant,Anti-Sulfur", Height=0.025inch, Length=0.126inch, Number of Terminations=2, Packaging="Tape and Reel", Pricing 1="1=11,40000, 10=10,36300, 25=9,32640, 50=8,03100, 100=7,38340 (USD)", RoHS=Yes, RoHS Compliant=Yes, Stock 1=1437, Supplier 1=Digi-Key, Width=0.062inch
R3 R4: library part R, "Res Thick Film 1206 4.7K Ohm 5% 1/4W ±200ppm/°C Molded SMD Punched Carrier T/R", Case Code (Imperial)=1206, Case Code (Metric)=3216, Manufacturer Part Number=ERJ-8GEYJ472V, Max Operating Temperature=155°C, Max Power Dissipation=250mW, Min Operating Temperature=-55°C, Package Quantity=1, Resistance=4.7kR, Resistance Tolerance=5%, Resistor Type="Thick Film", Supplier Part Number 1=65T8944, Temperature Coefficient=200ppm/°C, Voltage Rating=200V, Case/Package=1206, Category="Chip SMD Resistors", ComponentLink1Description=https://datasheet.ciiva.com/22781/1500035-22781542.pdf?src-supplier=Farnell, ComponentLink1URL=https://datasheet.ciiva.com/22781/1500035-22781542.pdf?src-supplier=Farnell, ComponentLink2Description=https://datasheet.ciiva.com/46377/1500035-46377622.pdf?src-supplier=Element14, ComponentLink2URL=https://datasheet.ciiva.com/46377/1500035-46377622.pdf?src-supplier=Element14, ComponentLink3Description=https://datasheet.ciiva.com/28514/1678796-28514270.pdf?src-supplier=Element14, ComponentLink3URL=https://datasheet.ciiva.com/28514/1678796-28514270.pdf?src-supplier=Element14, ComponentLink4Description=https://datasheet.ciiva.com/28683/1678796-28683449.pdf?src-supplier=Element14, ComponentLink4URL=https://datasheet.ciiva.com/28683/1678796-28683449.pdf?src-supplier=Element14, ComponentLink5Description=https://datasheet.ciiva.com/16774/70255313-16774777.pdf?src-supplier=Allied+Electronics, ComponentLink5URL=https://datasheet.ciiva.com/16774/70255313-16774777.pdf?src-supplier=Allied+Electronics, ComponentLink6Description=https://datasheet.ciiva.com/9195/aoa0000ce1-9195692.pdf?src-supplier=Avnet, ComponentLink6URL=https://datasheet.ciiva.com/9195/aoa0000ce1-9195692.pdf?src-supplier=Avnet, ComponentLink7Description=https://datasheet.ciiva.com/16508/aoa0000ce1-16508170.pdf?src-supplier=Future+Electronics, ComponentLink7URL=https://datasheet.ciiva.com/16508/aoa0000ce1-16508170.pdf?src-supplier=Future+Electronics, ComponentLink8Description=https://datasheet.ciiva.com/15159/getdatasheetpartid-250262-15159117.pdf?src-supplier=Verical, ComponentLink8URL=https://datasheet.ciiva.com/15159/getdatasheetpartid-250262-15159117.pdf?src-supplier=Verical, ComponentLink9Description=https://datasheet.ciiva.com/48531/aoa0000ce1-48531983.pdf?src-supplier=Avnet, ComponentLink9URL=https://datasheet.ciiva.com/48531/aoa0000ce1-48531983.pdf?src-supplier=Avnet, ComponentLink10Description=https://datasheet.ciiva.com/30085/4aoa0000ce1-30085593.pdf?src-supplier=Onlinecomponents.com, ComponentLink10URL=https://datasheet.ciiva.com/30085/4aoa0000ce1-30085593.pdf?src-supplier=Onlinecomponents.com, ComponentLink11Description=https://datasheet.ciiva.com/17213/aoa0000ce1-17213195.pdf?src-supplier=Avnet+Europe, ComponentLink11URL=https://datasheet.ciiva.com/17213/aoa0000ce1-17213195.pdf?src-supplier=Avnet+Europe, ComponentLink12Description=https://datasheet.ciiva.com/16512/aoa0000ce1-16512492.pdf?src-supplier=Avnet+Asia, ComponentLink12URL=https://datasheet.ciiva.com/16512/aoa0000ce1-16512492.pdf?src-supplier=Avnet+Asia, Construction=Rectangular, Contact Plating=Tin, Depth=1.6mm, Features="Automotive AEC-Q200", Height=0.028inch, Lead Free="Lead Free", Length=3.2mm, Military Standard=Not, Mount="Surface Mount", Number of Terminations=2, Packaging="Tape and Reel", Power Rating=250mW, Pricing 1="1=0,20200, 25=0,15000, 50=0,10600, 100=0,06200, 250=0,05000, 500=0,03600, 1000=0,02400 (USD)", Radiation Hardening=No, REACH SVHC="No SVHC", RoHS=Yes, RoHS Compliant=Yes, Series=ERJ, Size Code=1206, Stock 1=49650, Supplier 1=Newark, Termination=SMD/SMT, Tolerance=5%, Voltage Rating (DC)=200V, Width=1.6mm
R5 R6: library part RC0805FR-07200RL, "200 Ohm  0805 ± 1.00% 0.125W ± 100ppm/℃", Case Code (Imperial)=0603, Case Code (Metric)=1608, Manufacturer=Yageo, Manufacturer Part Number=RC0603FR-07200RL, Max Operating Temperature=155°C, Max Power Dissipation=100mW, Min Operating Temperature=-55°C, Package Quantity=5000, Resistance=200R, Resistance Tolerance=1%, Resistor Type="Thick Film", Supplier Part Number 1=6183842, Temperature Coefficient=100ppm/°C, Voltage Rating=50V, Working Voltage=75V, Case/Package=0603, Category="Chip SMD Resistors", ComponentLink1Description=https://datasheet.ciiva.com/11809/0900766b80f96399-11809240.pdf?src-supplier=RSComponents, ComponentLink1URL=https://datasheet.ciiva.com/11809/0900766b80f96399-11809240.pdf?src-supplier=RSComponents, ComponentLink2Description=https://datasheet.ciiva.com/46395/443971-46395029.pdf?src-supplier=Element14, ComponentLink2URL=https://datasheet.ciiva.com/46395/443971-46395029.pdf?src-supplier=Element14, ComponentLink3Description=https://datasheet.ciiva.com/2519/pyu-r-int-thick-7-2519721.pdf?src-supplier=Digi-Key, ComponentLink3URL=https://datasheet.ciiva.com/2519/pyu-r-int-thick-7-2519721.pdf?src-supplier=Digi-Key, ComponentLink4Description=https://datasheet.ciiva.com/2519/pyu-r-int-thick-7-2519722.pdf?src-supplier=Digi-Key, ComponentLink4URL=https://datasheet.ciiva.com/2519/pyu-r-int-thick-7-2519722.pdf?src-supplier=Digi-Key, ComponentLink5Description=https://datasheet.ciiva.com/2519/pyu-r-int-thick-7-2519720.pdf?src-supplier=Digi-Key, ComponentLink5URL=https://datasheet.ciiva.com/2519/pyu-r-int-thick-7-2519720.pdf?src-supplier=Digi-Key, ComponentLink6Description=https://datasheet.ciiva.com/12667/rc0805-12667066.pdf?src-supplier=Mouser, ComponentLink6URL=https://datasheet.ciiva.com/12667/rc0805-12667066.pdf?src-supplier=Mouser, ComponentLink7Description=https://datasheet.ciiva.com/15189/getdatasheetpartid-327982-15189926.pdf?src-supplier=Verical, ComponentLink7URL=https://datasheet.ciiva.com/15189/getdatasheetpartid-327982-15189926.pdf?src-supplier=Verical, Construction=Rectangular, Depth=0.8mm, Features="Moisture Resistant", Height=0.45mm, Lead Free="Lead Free", Length=1.6mm, Military Standard=Not, Mount="Surface Mount", Number of Pins=2, Number of Terminations=2, Packaging="Tape and Reel", Power Rating=100mW, Pricing 1="1=0,10000, 10=0,02400, 100=0,00970, 1000=0,00436, 2500=0,00378 (USD)", Pricing 2="5000=0,00300 (USD)", REACH SVHC="No SVHC", RoHS=Yes, RoHS Compliant=Yes, Series=RC, Size Code=0805, Stock 1=1049, Stock 2=1, Supplier 1=RSComponents, Technology="THICK FILM", Termination=SMD/SMT, Tolerance=1%, Voltage Rating (DC)=50V, Width=0.8mm
R7 R8: library part RC0805FR-07100RL, "100R ± 1.00% 0.125W ± 100ppm/℃ 0805", Case Code (Imperial)=0805, Case Code (Metric)=2012, Manufacturer=Yageo, Max Operating Temperature=155°C, Max Power Dissipation=125mW, Min Operating Temperature=-55°C, Package Quantity=5000, Resistance=100R, Resistor Type="Thick Film", Supplier Part Number 1=6185135, Temperature Coefficient=100ppm/°C, Tolerance=1%, Voltage Rating=150V, Application(s)="HIGH RELIABILITY", Case/Package=0805, Category="Chip SMD Resistors", ComponentLink1Description=https://datasheet.ciiva.com/11808/0900766b8106beab-11808877.pdf?src-supplier=RSComponents, ComponentLink1URL=https://datasheet.ciiva.com/11808/0900766b8106beab-11808877.pdf?src-supplier=RSComponents, ComponentLink2Description=https://datasheet.ciiva.com/7941/1697719-7941680.pdf?src-supplier=Element14, ComponentLink2URL=https://datasheet.ciiva.com/7941/1697719-7941680.pdf?src-supplier=Element14, ComponentLink3Description=https://datasheet.ciiva.com/7941/1686128-7941679.pdf?src-supplier=Element14, ComponentLink3URL=https://datasheet.ciiva.com/7941/1686128-7941679.pdf?src-supplier=Element14, ComponentLink4Description=https://datasheet.ciiva.com/7660/38627-7660797.pdf?src-supplier=Element14, ComponentLink4URL=https://datasheet.ciiva.com/7660/38627-7660797.pdf?src-supplier=Element14, ComponentLink5Description=https://datasheet.ciiva.com/22747/444164-22747535.pdf?src-supplier=Element14, ComponentLink5URL=https://datasheet.ciiva.com/22747/444164-22747535.pdf?src-supplier=Element14, ComponentLink6Description=https://datasheet.ciiva.com/46447/444164-46447562.pdf?src-supplier=Element14, ComponentLink6URL=https://datasheet.ciiva.com/46447/444164-46447562.pdf?src-supplier=Element14, ComponentLink7Description=https://datasheet.ciiva.com/2456/pyu-r-int-thick-7-2456988.pdf?src-supplier=Digi-Key, ComponentLink7URL=https://datasheet.ciiva.com/2456/pyu-r-int-thick-7-2456988.pdf?src-supplier=Digi-Key, ComponentLink8Description=https://datasheet.ciiva.com/2456/pyu-r-int-thick-7-2456989.pdf?src-supplier=Digi-Key, ComponentLink8URL=https://datasheet.ciiva.com/2456/pyu-r-int-thick-7-2456989.pdf?src-supplier=Digi-Key, ComponentLink9Description=https://datasheet.ciiva.com/2456/pyu-r-int-thick-7-2456987.pdf?src-supplier=Digi-Key, ComponentLink9URL=https://datasheet.ciiva.com/2456/pyu-r-int-thick-7-2456987.pdf?src-supplier=Digi-Key, ComponentLink10Description=https://datasheet.ciiva.com/17082/rc0805-17082697.pdf?src-supplier=Future+Electronics, ComponentLink10URL=https://datasheet.ciiva.com/17082/rc0805-17082697.pdf?src-supplier=Future+Electronics, Depth=1.25mm, Features="Moisture Resistant", Height=0.5mm, Lead Free="Lead Free", Lead Pitch=0.4mm, Length=2mm, Manufacturer Part Number=RC0805FR-07100RL, Military Standard=Not, Number of Pins=2, Number of Terminations=2, Packaging="Cut Tape", Power Rating=125mW, Pricing 1="5000=0,00700 (USD)", REACH SVHC=Unknown, RoHS=Yes, RoHS Compliant=Yes, Series=RC, Stock 1=45000, Supplier 1=RSComponents, Technology="THICK FILM", Termination=SMD/SMT, Type="General Purpose", Voltage Rating (DC)=150V, Weight=0.000917oz, Width=1.25mm
R9 R10: library part RC0805FR-074K7L, "4700Ω ± 1.00% 0.125W ± 100ppm/℃ 0805", Case Code (Imperial)=0805, Case Code (Metric)=2012, Manufacturer=Yageo, Max Operating Temperature=155°C, Max Power Dissipation=125mW, Min Operating Temperature=-55°C, Package Quantity=5000, Resistance=4.7kR, Resistance Tolerance=1%, Resistor Type="Thick Film", Supplier Part Number 1=6181408, Temperature Coefficient=100ppm/°C, Voltage Rating=150V, Case/Package=0805, Category="Chip SMD Resistors", ComponentLink1Description=https://datasheet.ciiva.com/11808/0900766b8106beab-11808155.pdf?src-supplier=RSComponents, ComponentLink1URL=https://datasheet.ciiva.com/11808/0900766b8106beab-11808155.pdf?src-supplier=RSComponents, ComponentLink2Description=https://datasheet.ciiva.com/7941/1686128-7941805.pdf?src-supplier=Element14, ComponentLink2URL=https://datasheet.ciiva.com/7941/1686128-7941805.pdf?src-supplier=Element14, ComponentLink3Description=https://datasheet.ciiva.com/46447/444164-46447583.pdf?src-supplier=Element14, ComponentLink3URL=https://datasheet.ciiva.com/46447/444164-46447583.pdf?src-supplier=Element14, ComponentLink4Description=https://datasheet.ciiva.com/6547/pyu-r-int-thick-7-6547263.pdf?src-supplier=Digi-Key, ComponentLink4URL=https://datasheet.ciiva.com/6547/pyu-r-int-thick-7-6547263.pdf?src-supplier=Digi-Key, ComponentLink5Description=https://datasheet.ciiva.com/7941/444164-7941804.pdf?src-supplier=Element14, ComponentLink5URL=https://datasheet.ciiva.com/7941/444164-7941804.pdf?src-supplier=Element14, ComponentLink6Description=https://datasheet.ciiva.com/7941/444164-7941806.pdf?src-supplier=Element14, ComponentLink6URL=https://datasheet.ciiva.com/7941/444164-7941806.pdf?src-supplier=Element14, Construction=Rectangular, Depth=1.25mm, Features="Moisture Resistant", Height=0.024inch, Lead Free="Lead Free", Length=0.079inch, Manufacturer Part Number=RC0805FR-074K7L, Military Standard=Not, Number of Pins=2, Number of Terminations=2, Packaging="Tape and Reel", Power Rating=125mW, Pricing 1="5000=0,00700 (USD)", REACH SVHC="No SVHC", RoHS=Yes, RoHS Compliant=Yes, Series=RC, Size Code=0805, Stock 1=305000, Supplier 1=RSComponents, Technology="THICK FILM", Termination=SMD/SMT, Tolerance=1%, Voltage Rating (DC)=150V, Width=0.049inch
RESET WIFI: library part "SW Tact", "Tactile Switch"
U1: "This WiFi module has a 32-bit MCU micro and clock speeds supporting 80 MHz or 160 MHz. Supports the RTOS and integrated Wi-Fi MAC/BB/RF/PA/LNA, and has an on-board antenna.", Package=None, Supplier Part Number 1=1697593, Availability=Unavailable, MF=AI-Thinker, MP=ESP8266-12E/ESP-12E, Price=None, SnapEDA_Link=https://www.snapeda.com/parts/ESP8266-12E/ESP-12E/AI-Thinker/view-part/106414/?ref=snap, Supplier 1=RSComponents
UART: "Conn Shrouded Header (4 Sides) HDR 6 POS 2.54mm Solder ST Top Entry Thru-Hole SL™ Tube", Color=Black, Contact Resistance=30mR, Manufacturer=Molex, Max Operating Temperature=105°C, Min Operating Temperature=-40°C, Supplier Part Number 1=6792483, Category="Headers and Wire Housings", ComponentLink1Description=http://components.arrow.com/part/dataview/2934603S3153303N3303?src-supplier=Arrow+Electronics, ComponentLink1URL=http://components.arrow.com/part/dataview/2934603S3153303N3303?src-supplier=Arrow+Electronics, ComponentLink2Description=http://components.arrow.com/part/dataview/0323_00048382?src-supplier=Arrow+Europe, ComponentLink2URL=http://components.arrow.com/part/dataview/0323_00048382?src-supplier=Arrow+Europe, Connector Type="Male Pin", Contact Material=Bronze, Contact Mating Length=0.24inch, Contact Plating=Gold, Contact Type="Male Pin", Depth=6.6mm, Housing Color=Black, Housing Material=Polyester, Length=17.79mm, Manufacturer Part Number=0705430005, Mount="Through Hole", Number of Positions=6, Number of Rows=1, Orientation=Straight, Packaging=Rail/Tube, Pitch=0.1inch, Pricing 1="10=1,32100, 200=1,15000, 750=0,92500, 3000=0,75400, 6000=0,73000 (USD)", Radiation Hardening=No, RoHS=Yes, RoHS Compliant=Yes, Series="C-Grid® SL™ 70543", Stock 1=440, Supplier 1=RSComponents, Termination=Solder

## Free pads (board coordinates)
  round 129.92 hole 124.02: 5(160,100) 6(1840,100) 7(1850,1800) 8(120,1800)

## Via types
v1: diameter 24, hole 12, Top Layer to Bottom Layer, 4 vias

## Nets (pads, with @x,y where several pads share a name; then routed paths per layer and width w, separated by ;. In a path a pad name is that pad's centre, name@x,y a point inside that pad or via, vN(x,y) a via of type N, cw(c..) or ccw(c..) an arc to the next point about the centre after c; other vN are vias at no path point)
+3V3: C2.2 C3.2 ON.2 P1.5 R1.1 R2.2 R3.2 R4.2 U1.8 U1.18 UART.5 | length 4996.8
  Top Layer w15.75: C3.2 220,763 210,753 C2.2 282.61,600 297.02,585.59 R4.2 ; R2.2 413.47,570 401.47,582 370,582 R4.2 ; v1(851,1291) 837.61,1291 777.17,1230.55 R1.1 777.17,1153 551.61,1153 468.61,1070 468.61,775 370,676.39 R4.2@370,586 ; P1.5 1120.61,1520 1130.61,1510 1130.61,1484 1144.61,1470 1201.61,1470 1241.61,1430 1241.61,1205 1410,1036.61 R3.2 ; UART.5 1485.28,415.28 U1.18 1083.61,415.28 847.39,179.06 U1.8 657.61,179.06 637.61,199.06 637.61,447.4 557.61,527.4 ON.2 520.61,527.4 520.61,563 497.61,586 R4.2@370,586 ; R4.2 R4.2@370,586
  Bottom Layer w15.75: v1(851,1291) P1.5
BOOT: P1.3 Q2.3 | length 550.6
  Top Layer w10: Q2.3 1057.4,1397.4 P1.3
DTR: Q2.2 R9.1 UART.1 | length 2227.2
  Top Layer w10: R9.1 341.61,1333.58 368.03,1360 Q2.2 460,1374 506.61,1420.61 506.61,1574 557.61,1625 1757.61,1625 1820,1562.61 UART.1
GND: C1.1 C2.1 C3.1 P1.6 R2.1 R5.1 R6.1 RESET.1 U1.15 UART.6 WIFI.1@1390,1215 WIFI.1@1390,1500 | length 5970.2
  Top Layer w15.75: R5.1 R5.1@143.58,352.97 ; R2.1 302.61,350 255.61,397 187.61,397 R5.1@143.58,352.97 ; RESET.1@380,775 380,1060 250,1060 220,1030 C3.1 169.08,983.46 143.07,957.46 C2.1 143.07,474.51 143.58,474 R5.1@143.58,352.97 ; C1.1 1120,1580 P1.6 ; U1.15 1814.67,179.06 1882.84,247.22 R6.1 1882.84,587.16 UART.6 ; WIFI.1@1390,1215 WIFI.1@1390,1500
  Bottom Layer w15.75: RESET.1@380,775 505,650 UART.6 1891.14,721.14 1891.14,1194.47 1810.61,1275 1450,1275 WIFI.1@1390,1215 ; P1.6 1274.61,1520 1294.61,1500 WIFI.1@1390,1500
NetLED1_1: ON.1 R5.2 | length 467.4
  Top Layer w10: R5.2 216.42,316.19 227.61,305 442.61,305 487.61,350 487.61,442.6 497.61,452.6 ON.1
NetLED2_1: R6.2 WIFI.1@1490,295.2 | length 322.2
  Top Layer w10: WIFI.1@1490,295.2 1646.61,295.2 1651.81,290 R6.2
NetQ1_1: Q1.1 R9.2 | length 761
  Top Layer w10: R9.2 215.61,1406.42 215.61,1710 255.61,1750 458.61,1750 460.63,1747.98 Q1.1
NetQ2_1: Q2.1 R10.2 | length 313.7
  Top Layer w10: R10.2 332.61,1610 392.61,1550 392.61,1479.8 437.61,1434.8 Q2.1
NetR3_1: R3.1 U1.20 WIFI.2@1567.17,1215 WIFI.2@1567.17,1500 | length 1460.8
  Top Layer w10: U1.20 1557.61,572.76 1603.61,618.76 1603.61,833 1446.61,833 ; R3.1 1410,817 1426,833 1446.61,833 ; WIFI.2@1567.17,1500 1567.17,1215 1567.17,953.55 1446.61,833
NetR4_1: R4.1 RESET.2 U1.1 | length 1041.8
  Top Layer w10: v1(332.61,543) 370,543 R4.1 ; RESET.2@557.17,1060 557.17,775 601.93,730.24 U1.1
  Bottom Layer w10: v1(332.61,543) 332.61,817 337.61,822 505.61,822 511.61,816 557.17,816 RESET.2@557.17,775
RESET: C1.2 P1.1 Q1.3 R1.2 U1.3 | length 2184.3
  Top Layer w10: Q1.3 644.61,1550 674.61,1580 C1.2 780,1546.61 856.61,1470 1106.61,1470 1126.61,1450 1126.61,1390 956.61,1220 ; U1.3 747.61,572.76 760.61,585.76 760.61,760 749.61,771 677.61,771 646.61,802 646.61,1050 676.61,1080 797.61,1080 850,1132.39 R1.2 850,1220 956.61,1220 ; P1.1 980,1220 956.61,1220
RTS: Q1.2 R10.1 UART.2 | length 1957.7
  Top Layer w10: R10.1 353.61,1682.84 417.45,1619 417.45,1532.76 437.61,1512.6 Q1.2 460.63,1530 v1(434.61,1543)
  Bottom Layer w10: v1(434.61,1543) 813.43,1164.18 1267.28,1164.18 1289.46,1142 1688.3,1142 1780.3,1050 UART.2
RXD: P1.4 R7.1 UART.3 | length 1368.5
  Top Layer w10: R7.1 1130.61,1207.03 1130.61,1354 1143.61,1367 1167.61,1367 1180,1379.39 P1.4
  Bottom Layer w10: P1.4 1242.61,1357.39 1242.61,1230 1304.61,1168 1704.61,1168 1771.61,1101 1848.61,1101 1868.27,1081.34 1868.27,998.27 UART.3
RXD0: R7.2 U1.21 | length 800.5
  Top Layer w10: R7.2 1156.42,1130 1176.42,1110 1300.61,1110 1340.61,1070 1340.61,790 1319.61,769 1240.61,769 1240.61,651.5 U1.21
TXD: P1.2 R8.1 UART.4 | length 1174.7
  Top Layer w10: P1.2 1212.61,1287.39 1212.61,1165 v1(1240.61,1137) ; R8.1 1679.61,870 1699.61,850 UART.4
  Bottom Layer w10: v1(1240.61,1137) 1277.61,1100 1570,1100 UART.4
TXD0: R8.2 U1.22 | length 291.8
  Top Layer w10: U1.22 1427.85,730.24 1494.78,797.16 R8.2
WIFI: U1.17 WIFI.2@1490,370 | length 208
  Top Layer w10: U1.17 1375.61,336.54 1409.08,370 WIFI.2@1490,370
pads on no net: U1.2 U1.4 U1.5 U1.6 U1.7 U1.9 U1.10 U1.11 U1.12 U1.13 U1.14 U1.16 U1.19

## Polygon pours and split planes (outlines as drawn)
+3V3 on 3V3 Plane (split plane): 1948.22,1844.67 1948.22,222.67 1948.01,220.49 1948.01,115.67 1899.7,67.36 1899.12,66.89 1850.84,18.6 127.43,18.6 71.82,74.21 70.67,75.15 19.91,125.91 19.91,1831.49 78.32,1889.9 1902.99,1889.9
GND on GND Place (split plane): 1948.22,1844.67 1948.22,222.67 1948.01,220.49 1948.01,115.67 1899.7,67.36 1899.12,66.89 1850.84,18.6 127.43,18.6 71.82,74.21 70.67,75.15 19.91,125.91 19.91,1831.49 78.32,1889.9 1902.99,1889.9

## Silkscreen, mask and mechanical layers (free items; w line width, h text height)
Top Overlay:
  circle w10: c1840,1820 r30
  circle w10: c110,1830 r30
  circle w10: c1867.61,90 r30
  circle w10: c117.61,100 r30
Mechanical 1:
  lines w10: -0.18,117.59 57.41,60 57.61,60 119.11,-1.5 369.11,-1.5 1574.62,-1.5 1750.92,-1.5 1859.16,-1.5 1913.34,52.68 1913.44,52.68 1968.11,107.34 1968.11,220.49 1968.32,220.71 1968.32,392.2 1968.32,1852.99 1911.31,1910 1905.08,1910 1869.9,1910 1820,1910 1770,1910 1527.61,1910 1518.22,1910 1447.52,1910 1362.14,1910 1270.15,1910 1194.16,1910 1139.5,1910 1052.61,1910 839.48,1910 476.08,1910 407.48,1910 70,1910 1.28,1841.28 -0.18,1841.28 -0.18,367.8 -0.18,117.59

## Text inside footprints (layer, text, board x,y; h text height)
P1: Bottom Overlay "2" at 1160,1220 h39.37 r270; Bottom Overlay "1" at 1060,1230 h39.37 r270